# Altium PCB USB-TTL.PcbDoc
Units mil, origin at the board's own origin, x right, y up, seen from the top; angles counter-clockwise.
Board outline 760 x 723.76 mil, 2 copper layers (Top Layer, Bottom Layer); 10 components, 9 nets, 67 pads, 19 vias.
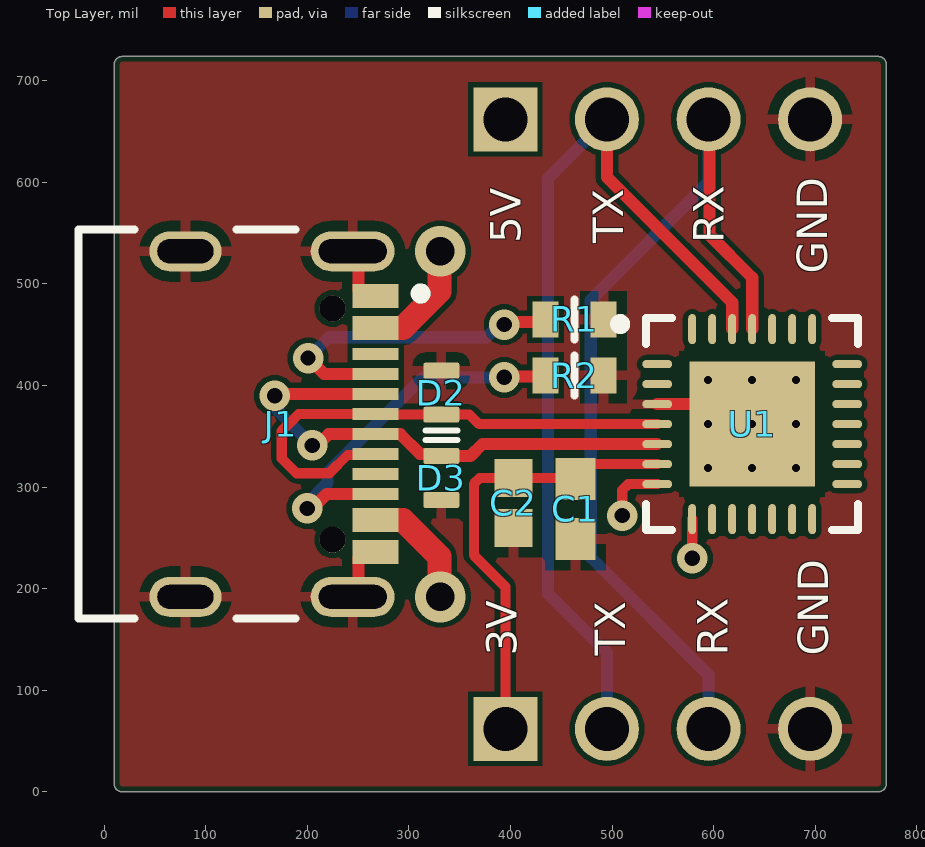
[diagram p0: Top Layer view]
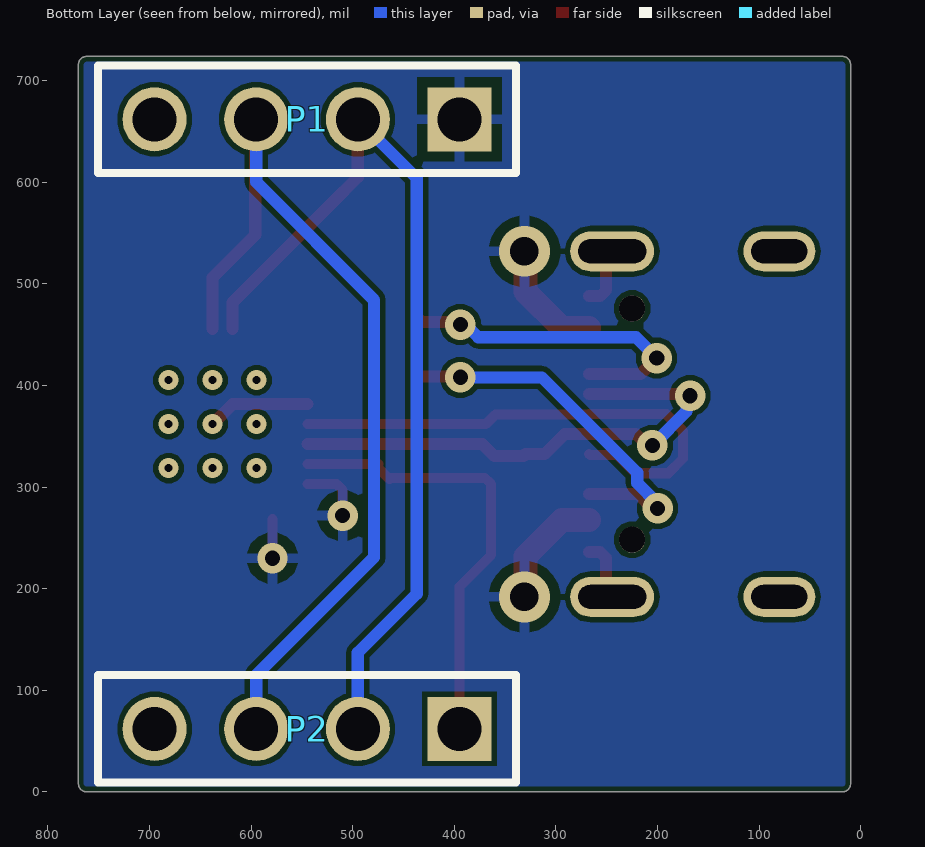
[diagram p1: Bottom Layer view, seen from below]
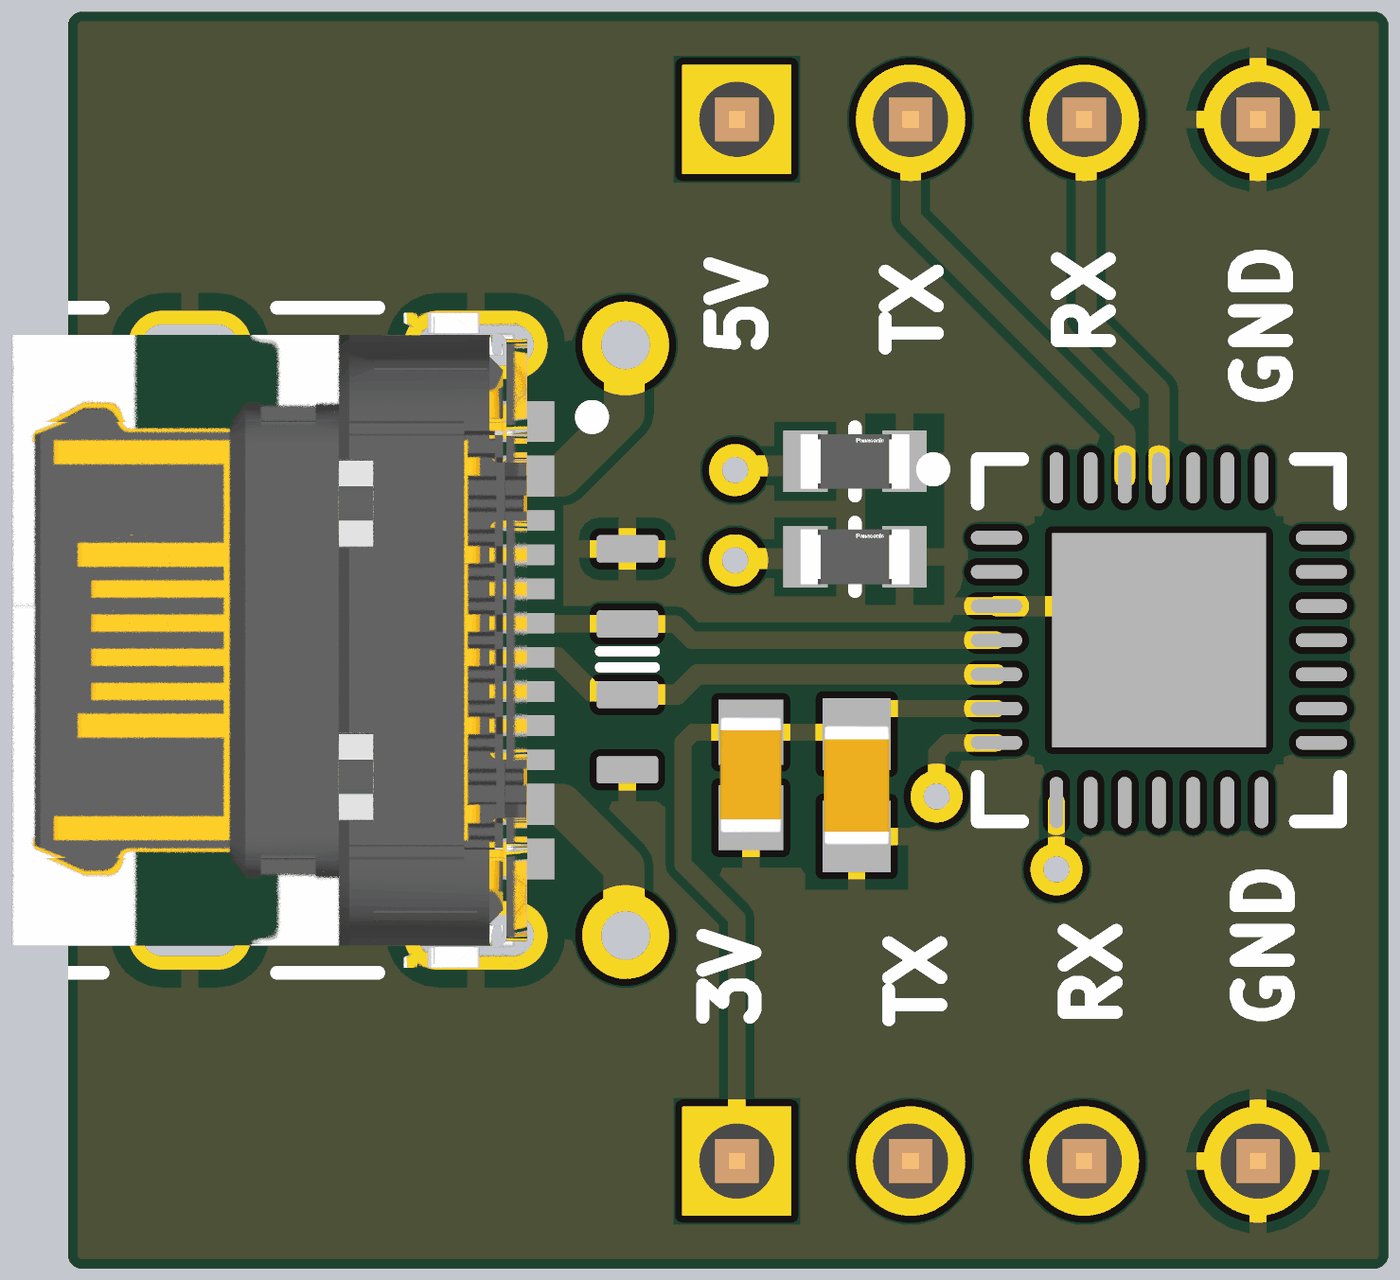
[diagram p2: 3D render of the assembled board from above, using the file's embedded part models]

## Layer stack, top to bottom
Top Solder: solder mask 0.4, Solder Resist, Dk 3.5
Top Layer: signal copper 1.4
Dielectric 1: dielectric 12.6, FR-4, Dk 4.8
Bottom Layer: signal copper 1.4
Bottom Solder: solder mask 0.4, Solder Resist, Dk 3.5

## Board outline
10,8.02 ccw(c17.9,8.02) 17.9,0.11 762.1,0.11 ccw(c762.1,8.01) 770,8.01 770,715.87 ccw(c762,715.87) 762,723.87 18.01,723.87 ccw(c18.01,715.87) 10,715.87

## Design rules (kind name [scope] priority, off if disabled: settings)
BoardOutlineClearance [All] p1: gap=5 ignorepadtopadclearanceinfootprint=FALSE
Clearance [All] p1: gap=5 ignorepadtopadclearanceinfootprint=FALSE except(0: Text-Hole; 10: Text-Text)
PolygonConnect [All] p1: connectstyle=Relief reliefconductorwidth=10 reliefentries=4 polygonreliefangle="90 Angle" airgapwidth=10
RoutingVias [All] p1: holewidth=28 width=50 viastyle="Through Hole" minholewidth=28 minwidth=50 maxholewidth=28 maxwidth=50
SolderMaskExpansion [All] p1: expansion=4 istentingtop=FALSE
Width [All] p1: maxlimit=30 minlimit=10 preferedwidth=10 minimp=50.000000 maximp=50.000000 favimp=50.000000
30 further rules are at their usual default settings.

## Components (designator, comment, footprint, x,y, rotation, side; value= is the part's Value field where it differs from the comment)
C1 "Capacitor 1 uF +/- 10% 16 V 0603" CAPC1608X94X35NL15T15 464,278.47 r270 top value=1µF
C2 "Capacitor 100 nF +/-10% 50 V 0603" CAPC1608X90X40NL10T20 403,284.39 r270 top value=100nF
D2 "ESDA25P35-1U1M" STM-QFN1610 332,393 r90 top
D3 "ESDA25P35-1U1M" STM-QFN1610 332,309 r270 top
J1 "USB4105-GF-A" FP-USB4105-GF-A-MFG 126,362 r270 top
P1 "61300411121" 61300411121 545,662 r0 bottom
P2 "61300411121" 61300411121 545,62 r0 bottom
R1 "ERA-3AEB512V" FP-ERA3A-MFG 463,465 r0 top
R2 "ERA-3AEB512V" FP-ERA3A-MFG 463,410 r0 top
U1 "CP2102-GM" SLAB-QFN-28-3125x3125TP_L 638,362 r0 top

## Footprints (in the part's own frame and the unit in brackets; to place one, negate y for a bottom-side part, rotate by r counter-clockwise, add the part's x,y. Pads: shape width x height; smd on the part's side, far side on the other; paste and mask are expansions set on the pad)
61300411121 [mm] "Pin Header, pitch 2.54 mm, THT, Vertical, single row, 4p"
  rect 1.6x1.6 hole 1.1: 1(-3.81,0)
  round 1.6 hole 1.1: 2(-1.27,0) 3(1.27,0) 4(3.81,0)
  silkscreen extent -5.23,-1.35 5.23,1.35, body extent -5.08,-1.27 5.08,1.27, height 8.57
CAPC1608X90X40NL10T20 [mm] "Chip Capacitor, 2-Leads, Body 1.70x0.90mm, IPC Medium Density"
  rect 0.95x0.95 smd: 1(-0.625,0) 2(0.625,0)
  body extent -0.85,-0.45 0.85,0.45, height 0.9
CAPC1608X94X35NL15T15 [mm] "Chip Capacitor, 2-Leads, Body 1.75x0.96mm, IPC Medium Density"
  rect 1.05x1 smd: 1(-0.75,0) 2(0.75,0)
  body extent -0.87,-0.48 0.87,0.48, height 0.94
FP-ERA3A-MFG [mm]
  rect 0.65x0.9 smd paste+0 mask+0: 1(-0.725,0) 2(0.725,0)
  silkscreen extent 0,-0.5 0,0.5, body extent -1.15,-0.6 1.15,0.6, height 0.25
FP-USB4105-GF-A-MFG [mm]
  rrect100% 1x2.1 hole 1.7 slot 0.6 at 0 deg paste-1000 mask+0: 1(-4.32,3.015) 2(4.32,3.015)
  rrect100% 1x1.8 hole 1.4 slot 0.6 at 0 deg paste-1000 mask+0: 3(-4.32,-1.165) 4(4.32,-1.165)
  rect 0.6x1.15 smd paste+0 mask+0: A1-B12(-3.2,3.59) A4-B9(-2.4,3.59) B1-A12(3.2,3.59) B4-A9(2.4,3.59)
  rect 0.3x1.15 smd paste+0 mask+0: A5(-1.25,3.59) A6(-0.25,3.59) A7(0.25,3.59) A8(1.25,3.59) B5(1.75,3.59) B6(0.75,3.59) B7(-0.75,3.59) B8(-1.75,3.59)
  round 0.65 hole 0.65 unplated paste-1000 mask+0: MT1(-2.89,2.515) MT2(2.89,2.515)
  silkscreen extent -4.86,-3.84 4.86,4.84, body extent -4.79,-3.76 4.79,3.77, height 3.26
SLAB-QFN-28-3125x3125TP_L [mm] "QFN, 28-Leads, Body 5x5mm, Pitch 0.5mm, Thermal Pad 3.13x3.13mm, IPC High Density"
  oval 0.75x0.2 smd: 1(-2.375,1.5) 2(-2.375,1) 3(-2.375,0.5) 4(-2.375,0) 5(-2.375,-0.5) 6(-2.375,-1) 7(-2.375,-1.5) 15(2.375,-1.5) 16(2.375,-1) 17(2.375,-0.5) 18(2.375,0) 19(2.375,0.5) 20(2.375,1) 21(2.375,1.5)
  oval 0.2x0.75 smd: 8(-1.5,-2.375) 9(-1,-2.375) 10(-0.5,-2.375) 11(0,-2.375) 12(0.5,-2.375) 13(1,-2.375) 14(1.5,-2.375) 22(1.5,2.375) 23(1,2.375) 24(0.5,2.375) 25(0,2.375) 26(-0.5,2.375) 27(-1,2.375) 28(-1.5,2.375)
  rect 3.13x3.13 smd: 29(0,0)
  silkscreen extent -3.42,-2.65 2.65,2.65, body extent -2.5,-2.5 2.5,2.5, height 1
STM-QFN1610 [mm] "SMD, 2-Leads, Body 1.6x1mm"
  rrect25% 0.4x0.9 smd: 1(-0.55,0) 2(0.55,0)
  silkscreen extent -0.95,-0.4 -0.95,0.4, body extent -0.8,-0.5 0.8,0.5, height 0.6

## Part data
C1: library part CMP-001-00003-6, "Chip Capacitor, 1 uF, +/- 10%, 16 V, 0603 (1608 Metric)", Capacitor Type=Ceramic, Case/Package=0603, Max Operating Temperature=125°C, Min Operating Temperature=-55°C, Tolerance=10%, Voltage Rating=16V, Mounting Technology=SM, Pins=2, RoHS Compliant=True
C2: library part CMP-001-00017-6, "Chip Capacitor, 100 nF, +/- 10%, 50 V, 0603 (1608 Metric)", Capacitor Type=Ceramic, Case/Package=0603, Max Operating Temperature=125°C, Min Operating Temperature=-55°C, Tolerance=10%, Voltage Rating=50V, Mounting Technology=SM, Pins=2, RoHS Compliant=True
D2 D3: library part CMP-004-00023-3, "TVS DIODE 22V 41V 1610", Case/Package="QFN1610 (0603)", Max Surge Current=35A, Peak Inverse Voltage=23.3V, Mounting Technology=SMT, Pins=2, RoHS Compliant=Yes
J1: library part CMP-002-00074-1, "Conn USB 2.0 Type C RCP 24 POS 0.3mm/0.5mm Solder RA SMD 24 Terminal 1 Port T/R"
P1 P2: library part CMP-002-00072-1, "CONN HEADER 4 POS 2.54"
R1 R2: library part CMP-009-00177-1, "Res Thin Film 0603 5.1K Ohm 0.1% 1/10W ±25ppm/°C Molded SMD SMD Punched Carrier T/R"
U1: library part CMP-015-00008-1, "USB to UART Bridge Controller UART/USB Interface Automotive 28-Pin QFN EP Tube", Max Supply Voltage=3.6V, Min Supply Voltage=3V, Pins=QFN

## Via types
v1: diameter 19.68, hole 7.87, Top Layer to Bottom Layer, 9 vias
v2: diameter 30, hole 15, Top Layer to Bottom Layer, 8 vias
v3: diameter 50, hole 28, Top Layer to Bottom Layer, 2 vias

## Nets (pads, with @x,y where several pads share a name; then routed paths per layer and width w, separated by ;. In a path a pad name is that pad's centre, name@x,y a point inside that pad or via, vN(x,y) a via of type N, cw(c..) or ccw(c..) an arc to the next point about the centre after c; other vN are vias at no path point)
GND: C1.2 C2.2 D2.2 D3.2 J1.1 J1.2 J1.3 J1.4 J1.A1-B12 J1.B1-A12 P1.4 P2.4 R1.2 R2.2 U1.3 U1.29 | length 199.2
  Top Layer w11.81: J1.2 250.61,197.83 250.61,230.11 256.51,236.02 J1.B1-A12 ; 250.61,512.39 250.61,500.8 250.61,493.89 256.51,487.98 J1.A1-B12 ; U1.3 618.32,381.68 v1(638,362)
  other v1: 594.69,318.69 638,318.69 681.31,318.69 594.69,362 681.31,362 594.69,405.31 638,405.31 681.31,405.31
NetJ1_A5: J1.A5 R1.1 | length 322.3
  Top Layer w12: v2(200.87,427) 216.66,411.21 J1.A5 ; v2(394,460) 396.5,462.5 431.96,462.5 R1.1
  Bottom Layer w12: v2(200.87,427) 221.29,447.41 376.54,447.41 389.13,460 v2(394,460)
NetJ1_B5: J1.B5 R2.1 | length 371.7
  Top Layer w12: v2(200,279) 204.87,279 218.97,293.1 J1.B5 ; v2@393,408 394,409 433.46,409 R2.1
  Bottom Layer w12: v2(200,279) 200,283.87 220.08,303.95 220.08,314.08 314,408 v2(394,408)
RX/TX: P1.3 P2.3 U1.25 | length 920.4
  Top Layer w12: P1.3 596,661 596,548 638,506 U1.25
  Bottom Layer w12: P2.3 595,115 479,231 479,484.17 595,600.17 P1.3
TX/RX: P1.2 P2.2 U1.26 | length 905.6
  Top Layer w12: P1.2 495,605 521,579 618.32,481.68 U1.26
  Bottom Layer w12: P2.2 495,137 437,195 437,604 P1.2
USB_N: D3.1 J1.A7 J1.B7 U1.5 | length 522.2
  Top Layer w11.81: v2(168,390) 169.53,391.53 J1.B7 ; v2(205,341) 209.92,341 221.08,352.16 291.62,352.16 311.15,332.62 330.03,332.62 D3.1 360.65,330.65 372.31,342.31 U1.5
  Bottom Layer w11.81: v2(168,390) 171.48,386.52 171.48,374.52 v2(205,341)
USB_P: D2.1 J1.A6 J1.B6 U1.4 | length 513.7
  Top Layer w10: J1.B6 266.43,331.57 239.57,331.57 221.65,313.65 189.51,313.65 175,328.16 175,355.36 191.49,371.84 J1.A6 267.59,371.59 331.75,371.59 D2.1 359.65,371.35 369,362 U1.4
VBUS: J1.A4-B9 J1.B4-A9 P1.1 U1.7 U1.8 | length 333.2
  Top Layer w10: v2(510,272) 510,297.09 515.86,302.94 U1.7 ; v2(579,230) U1.8@578.97,268.47
  Top Layer w23.62: J1.B4-A9 294.07,267.51 330,231.58 v3@330,192 ; J1.A4-B9 294.07,456.49 330.18,492.6 330.18,529.18 v3@331,530
  other v3: 331,191.92 331,532.08
VDD: C1.1 C2.1 P2.1 U1.6 | length 447.4
  Top Layer w10: P2.1 395,202 364,233 364,303.14 369.86,309 463,309 C1.1 C1.1@478.63,322.63 ; C1.1@474.63,322.63 C1.1@478.63,322.63 ; U1.6 C1.1@478.63,322.63
pads on no net: J1.A8 J1.B8 J1.MT1 J1.MT2 U1.1 U1.2 U1.9 U1.10 U1.11 U1.12 U1.13 U1.14 U1.15 U1.16 U1.17 U1.18 U1.19 U1.20 U1.21 U1.22 U1.23 U1.24 U1.27 U1.28

## Polygon pours and split planes (outlines as drawn)
VBUS on Bottom Layer "VBUS_L02_P001" (solid, remove dead copper, pour order 1): -9.08,741.99 819.26,741.99 817.85,740.57 817.85,-38.88 1.55,-38.88 -6.96,-47.38
GND on Top Layer "GND_L01_P000" (solid, remove dead copper, pour order 0): 11.35,720.31 14.94,723.26 767.66,721.53 767.66,3.8 763.67,0.72 12.33,3

## Silkscreen, mask and mechanical layers (free items; w line width, h text height)
Top Overlay:
  text "5V" at 409.99,540 h30 r90
  text "TX" at 510.99,540 h30 r90
  text "RX" at 609.99,540 h30 r90
  text "GND" at 712,510 h30 r90
  text "3V" at 406,134 h30 r90
  text "TX" at 512.99,134 h30 r90
  text "RX" at 614,134 h30 r90
  text "GND" at 713,134 h30 r90